# EAGLE board ev9200g_pac (EAGLE 3.55)

No outline drawn. Coordinates in mm, seen from the top.
Copper layers used: 

## Footprints (pad centres in the part's own frame; a part is rotated, then mirrored left to right if it is on the bottom)
G-44 = smd 0.5 x 2.35 rotated 4.3:  -4,-6.668;  3.2,-6.668 | smd 0.5 x 2.35 rotated 4.4:  -3.2,-6.668 | smd 0.5 x 2.35 rotated 4.5:  -2.4,-6.668;  -1.6,6.668 | smd 0.5 x 2.35 rotated 4.6:  -1.6,-6.668 | smd 0.5 x 2.35 rotated 4.7:  -0.8,-6.668;  0,-6.668 | smd 0.5 x 2.35 rotated 4.8:  0.8,-6.668 | smd 0.5 x 2.35 rotated 4.9:  1.6,-6.668 | smd 0.5 x 2.35 rotated 5:  2.4,-6.668 | smd 0.5 x 2.35 rotated 26.8:  4,-6.668 | smd 2.35 x 0.5 rotated 49.3:  6.668,-4 | smd 2.35 x 0.5 rotated 71.8:  6.668,-3.2 | smd 2.35 x 0.5 rotated 94.3:  6.668,-2.4 | smd 2.35 x 0.5 rotated 116.8:  6.668,-1.6 | smd 2.35 x 0.5 rotated 139.3:  6.668,-0.8 | smd 2.35 x 0.5 rotated 161.8:  6.668,0 | smd 2.35 x 0.5 rotated 184.3:  6.668,0.8 | smd 2.35 x 0.5 rotated 206.8:  6.668,1.6 | smd 2.35 x 0.5 rotated 4.4:  6.668,2.4 | smd 2.35 x 0.5 rotated 26.9:  6.668,3.2 | smd 2.35 x 0.5 rotated 49.4:  6.668,4 | smd 0.5 x 2.35 rotated 71.9:  4,6.668 | smd 0.5 x 2.35 rotated 94.4:  3.2,6.668 | smd 0.5 x 2.35 rotated 116.9:  2.4,6.668 | smd 0.5 x 2.35 rotated 139.4:  1.6,6.668 | smd 0.5 x 2.35 rotated 161.9:  0.8,6.668 | smd 0.5 x 2.35 rotated 184.4:  0,6.668 | smd 0.5 x 2.35 rotated 206.9:  -0.8,6.668 | smd 0.5 x 2.35 rotated 27:  -2.4,6.668 | smd 0.5 x 2.35 rotated 49.5:  -3.2,6.668 | smd 0.5 x 2.35 rotated 72:  -4,6.668 | smd 2.35 x 0.5 rotated 94.5:  -6.668,4 | smd 2.35 x 0.5 rotated 117:  -6.668,3.2 | smd 2.35 x 0.5 rotated 139.5:  -6.668,2.4 | smd 2.35 x 0.5 rotated 162:  -6.668,1.6 | smd 2.35 x 0.5 rotated 184.5:  -6.668,0.8 | smd 2.35 x 0.5 rotated 207:  -6.668,0 | smd 2.35 x 0.5 rotated 4.6:  -6.668,-0.8 | smd 2.35 x 0.5 rotated 27.1:  -6.668,-1.6 | smd 2.35 x 0.5 rotated 49.6:  -6.668,-2.4 | smd 2.35 x 0.5 rotated 72.1:  -6.668,-3.2 | smd 2.35 x 0.5 rotated 94.6:  -6.668,-4 | hole 2.2: 0,0 | hole 1.57: 2.489,-2.489; -2.489,2.489
G-64 = smd 0.6 x 2.35 rotated 4.6:  -6,-8.775;  2,8.775 | smd 0.6 x 2.35 rotated 4.7:  -5,-8.775;  -4,-8.775;  -8,8.775 | smd 0.6 x 2.35 rotated 4.8:  -3,-8.775 | smd 0.6 x 2.35 rotated 4.9:  -2,-8.775 | smd 0.6 x 2.35 rotated 5:  -1,-8.775 | smd 0.6 x 2.35 rotated 4.3:  0,-8.775;  -9,-8.775 | smd 0.6 x 2.35 rotated 26.8:  1,-8.775 | smd 0.6 x 2.35 rotated 49.3:  2,-8.775 | smd 0.6 x 2.35 rotated 71.8:  3,-8.775 | smd 0.6 x 2.35 rotated 94.3:  4,-8.775 | smd 0.6 x 2.35 rotated 116.8:  5,-8.775 | smd 0.6 x 2.35 rotated 139.3:  6,-8.775 | smd 0.6 x 2.35 rotated 161.8:  7,-8.775 | smd 0.6 x 2.35 rotated 4.5:  -7,-8.775 | smd 0.6 x 2.35 rotated 4.4:  -8,-8.775 | smd 0.6 x 2.35 rotated 184.3:  8,-8.775 | smd 0.6 x 2.35 rotated 206.8:  9,-8.775 | smd 2.35 x 0.6 rotated 71.9:  11.675,-3 | smd 2.35 x 0.6 rotated 94.4:  11.675,-2 | smd 2.35 x 0.6 rotated 116.9:  11.675,-1 | smd 2.35 x 0.6 rotated 139.4:  11.675,0 | smd 2.35 x 0.6 rotated 161.9:  11.675,1 | smd 2.35 x 0.6 rotated 184.4:  11.675,2 | smd 2.35 x 0.6 rotated 206.9:  11.675,3 | smd 2.35 x 0.6 rotated 4.5:  11.675,4 | smd 2.35 x 0.6 rotated 27:  11.675,5 | smd 2.35 x 0.6 rotated 49.5:  11.675,6 | smd 2.35 x 0.6 rotated 49.4:  11.675,-4 | smd 2.35 x 0.6 rotated 26.9:  11.675,-5 | smd 2.35 x 0.6 rotated 4.4:  11.675,-6 | smd 0.6 x 2.35 rotated 139.5:  6,8.775 | smd 0.6 x 2.35 rotated 162:  5,8.775 | smd 0.6 x 2.35 rotated 184.5:  4,8.775 | smd 0.6 x 2.35 rotated 207:  3,8.775 | smd 0.6 x 2.35 rotated 27.1:  1,8.775 | smd 0.6 x 2.35 rotated 49.6:  0,8.775 | smd 0.6 x 2.35 rotated 72.1:  -1,8.775 | smd 0.6 x 2.35 rotated 94.6:  -2,8.775 | smd 0.6 x 2.35 rotated 117.1:  -3,8.775 | smd 0.6 x 2.35 rotated 139.6:  -4,8.775 | smd 0.6 x 2.35 rotated 162.1:  -5,8.775 | smd 0.6 x 2.35 rotated 184.6:  -6,8.775 | smd 0.6 x 2.35 rotated 207.1:  -7,8.775 | smd 0.6 x 2.35 rotated 117:  7,8.775 | smd 0.6 x 2.35 rotated 94.5:  8,8.775 | smd 0.6 x 2.35 rotated 27.2:  -9,8.775 | smd 0.6 x 2.35 rotated 72:  9,8.775 | smd 2.35 x 0.6 rotated 117.2:  -11.675,3 | smd 2.35 x 0.6 rotated 139.7:  -11.675,2 | smd 2.35 x 0.6 rotated 162.2:  -11.675,1 | smd 2.35 x 0.6 rotated 184.7:  -11.675,0 | smd 2.35 x 0.6 rotated 207.2:  -11.675,-1 | smd 2.35 x 0.6 rotated 4.7:  -11.675,-2 | smd 2.35 x 0.6 rotated 27.2:  -11.675,-3 | smd 2.35 x 0.6 rotated 49.7:  -11.675,-4;  -11.675,6 | smd 2.35 x 0.6 rotated 72.2:  -11.675,-5;  -11.675,5 | smd 2.35 x 0.6 rotated 94.7:  -11.675,-6;  -11.675,4 | hole 1.57: 6,-2.5 | hole 2.36: -5.5,2.5
G-74 = smd 0.6 x 2.35 rotated 4.3:  -8,-11.675;  1,-11.675 | smd 0.6 x 2.35 rotated 4.4:  -7,-11.675 | smd 0.6 x 2.35 rotated 4.5:  -6,-11.675 | smd 0.6 x 2.35 rotated 4.6:  -5,-11.675;  7,11.675 | smd 0.6 x 2.35 rotated 4.7:  -4,-11.675;  -3,-11.675;  -3,11.675 | smd 0.6 x 2.35 rotated 4.8:  -2,-11.675 | smd 0.6 x 2.35 rotated 4.9:  -1,-11.675 | smd 0.6 x 2.35 rotated 5:  0,-11.675 | smd 0.6 x 2.35 rotated 26.8:  2,-11.675 | smd 0.6 x 2.35 rotated 49.3:  3,-11.675 | smd 0.6 x 2.35 rotated 71.8:  4,-11.675 | smd 0.6 x 2.35 rotated 94.3:  5,-11.675 | smd 0.6 x 2.35 rotated 116.8:  6,-11.675 | smd 0.6 x 2.35 rotated 139.3:  7,-11.675 | smd 0.6 x 2.35 rotated 161.8:  8,-11.675 | smd 0.6 x 2.35 rotated 184.3:  9,-11.675 | smd 2.35 x 0.6 rotated 206.8:  11.675,-9 | smd 2.35 x 0.6 rotated 4.4:  11.675,-8 | smd 2.35 x 0.6 rotated 26.9:  11.675,-7 | smd 2.35 x 0.6 rotated 49.4:  11.675,-6 | smd 2.35 x 0.6 rotated 71.9:  11.675,-5 | smd 2.35 x 0.6 rotated 94.4:  11.675,-4 | smd 2.35 x 0.6 rotated 116.9:  11.675,-3 | smd 2.35 x 0.6 rotated 139.4:  11.675,-2 | smd 2.35 x 0.6 rotated 161.9:  11.675,-1 | smd 2.35 x 0.6 rotated 184.4:  11.675,0 | smd 2.35 x 0.6 rotated 206.9:  11.675,1 | smd 2.35 x 0.6 rotated 4.5:  11.675,2 | smd 2.35 x 0.6 rotated 27:  11.675,3 | smd 2.35 x 0.6 rotated 49.5:  11.675,4 | smd 2.35 x 0.6 rotated 72:  11.675,5 | smd 2.35 x 0.6 rotated 94.5:  11.675,6 | smd 2.35 x 0.6 rotated 117:  11.675,7 | smd 2.35 x 0.6 rotated 139.5:  11.675,8 | smd 2.35 x 0.6 rotated 162:  11.675,9 | smd 0.6 x 2.35 rotated 184.5:  9,11.675 | smd 0.6 x 2.35 rotated 207:  8,11.675 | smd 0.6 x 2.35 rotated 27.1:  6,11.675 | smd 0.6 x 2.35 rotated 49.6:  5,11.675 | smd 0.6 x 2.35 rotated 72.1:  4,11.675 | smd 0.6 x 2.35 rotated 94.6:  3,11.675 | smd 0.6 x 2.35 rotated 117.1:  2,11.675 | smd 0.6 x 2.35 rotated 139.6:  1,11.675 | smd 0.6 x 2.35 rotated 162.1:  0,11.675 | smd 0.6 x 2.35 rotated 184.6:  -1,11.675 | smd 0.6 x 2.35 rotated 207.1:  -2,11.675 | smd 0.6 x 2.35 rotated 27.2:  -4,11.675 | smd 0.6 x 2.35 rotated 49.7:  -5,11.675 | smd 0.6 x 2.35 rotated 72.2:  -6,11.675 | smd 0.6 x 2.35 rotated 94.7:  -7,11.675 | smd 0.6 x 2.35 rotated 117.2:  -8,11.675 | smd 0.6 x 2.35 rotated 139.7:  -9,11.675 | smd 2.35 x 0.6 rotated 162.2:  -11.675,9;  -11.675,-1 | smd 2.35 x 0.6 rotated 184.7:  -11.675,8;  -11.675,-2 | smd 2.35 x 0.6 rotated 207.2:  -11.675,7;  -11.675,-3 | smd 2.35 x 0.6 rotated 4.7:  -11.675,6 | smd 2.35 x 0.6 rotated 27.2:  -11.675,5 | smd 2.35 x 0.6 rotated 49.7:  -11.675,4 | smd 2.35 x 0.6 rotated 72.2:  -11.675,3 | smd 2.35 x 0.6 rotated 94.7:  -11.675,2 | smd 2.35 x 0.6 rotated 117.2:  -11.675,1 | smd 2.35 x 0.6 rotated 139.7:  -11.675,0 | smd 2.35 x 0.6 rotated 4.8:  -11.675,-4 | smd 2.35 x 0.6 rotated 27.3:  -11.675,-5 | smd 2.35 x 0.6 rotated 49.8:  -11.675,-6 | smd 2.35 x 0.6 rotated 72.3:  -11.675,-7 | smd 2.35 x 0.6 rotated 94.8:  -11.675,-8 | hole 2.36: -5.5,2.5 | hole 1.57: 5.5,-2.5
G-80 = smd 0.5 x 2.35 rotated 4.3:  -9.2,-8.775;  -2,-8.775 | smd 0.5 x 2.35 rotated 4.4:  -8.4,-8.775;  6,-8.775 | smd 0.5 x 2.35 rotated 4.5:  -7.6,-8.775 | smd 0.5 x 2.35 rotated 4.6:  -6.8,-8.775 | smd 0.5 x 2.35 rotated 4.7:  -6,-8.775;  -5.2,-8.775;  2,8.775;  -6,8.775 | smd 0.5 x 2.35 rotated 4.8:  -4.4,-8.775 | smd 0.5 x 2.35 rotated 4.9:  -3.6,-8.775 | smd 0.5 x 2.35 rotated 5:  -2.8,-8.775 | smd 0.5 x 2.35 rotated 26.8:  -1.2,-8.775 | smd 0.5 x 2.35 rotated 49.3:  -0.4,-8.775 | smd 0.5 x 2.35 rotated 71.8:  0.4,-8.775 | smd 0.5 x 2.35 rotated 94.3:  1.2,-8.775 | smd 0.5 x 2.35 rotated 116.8:  2,-8.775 | smd 0.5 x 2.35 rotated 139.3:  2.8,-8.775 | smd 0.5 x 2.35 rotated 161.8:  3.6,-8.775 | smd 0.5 x 2.35 rotated 184.3:  4.4,-8.775 | smd 0.5 x 2.35 rotated 206.8:  5.2,-8.775 | smd 0.5 x 2.35 rotated 26.9:  6.8,-8.775 | smd 0.5 x 2.35 rotated 49.4:  7.6,-8.775 | smd 0.5 x 2.35 rotated 71.9:  8.4,-8.775 | smd 0.5 x 2.35 rotated 94.4:  9.2,-8.775 | smd 2.35 x 0.5 rotated 116.9:  11.675,-6 | smd 2.35 x 0.5 rotated 139.4:  11.675,-5.2 | smd 2.35 x 0.5 rotated 161.9:  11.675,-4.4 | smd 2.35 x 0.5 rotated 184.4:  11.675,-3.6 | smd 2.35 x 0.5 rotated 206.9:  11.675,-2.8 | smd 2.35 x 0.5 rotated 4.5:  11.675,-2 | smd 2.35 x 0.5 rotated 27:  11.675,-1.2 | smd 2.35 x 0.5 rotated 49.5:  11.675,-0.4 | smd 2.35 x 0.5 rotated 72:  11.675,0.4 | smd 2.35 x 0.5 rotated 94.5:  11.675,1.2 | smd 2.35 x 0.5 rotated 117:  11.675,2 | smd 2.35 x 0.5 rotated 139.5:  11.675,2.8 | smd 2.35 x 0.5 rotated 162:  11.675,3.6 | smd 2.35 x 0.5 rotated 184.5:  11.675,4.4 | smd 2.35 x 0.5 rotated 207:  11.675,5.2 | smd 2.35 x 0.5 rotated 4.6:  11.675,6 | smd 0.5 x 2.35 rotated 27.1:  9.2,8.775 | smd 0.5 x 2.35 rotated 49.6:  8.4,8.775 | smd 0.5 x 2.35 rotated 72.1:  7.6,8.775 | smd 0.5 x 2.35 rotated 94.6:  6.8,8.775 | smd 0.5 x 2.35 rotated 117.1:  6,8.775 | smd 0.5 x 2.35 rotated 139.6:  5.2,8.775 | smd 0.5 x 2.35 rotated 162.1:  4.4,8.775 | smd 0.5 x 2.35 rotated 184.6:  3.6,8.775 | smd 0.5 x 2.35 rotated 207.1:  2.8,8.775 | smd 0.5 x 2.35 rotated 27.2:  1.2,8.775;  -6.8,8.775 | smd 0.5 x 2.35 rotated 49.7:  0.4,8.775;  -7.6,8.775 | smd 0.5 x 2.35 rotated 72.2:  -0.4,8.775;  -8.4,8.775 | smd 0.5 x 2.35 rotated 94.7:  -1.2,8.775;  -9.2,8.775 | smd 0.5 x 2.35 rotated 117.2:  -2,8.775 | smd 0.5 x 2.35 rotated 139.7:  -2.8,8.775 | smd 0.5 x 2.35 rotated 162.2:  -3.6,8.775 | smd 0.5 x 2.35 rotated 184.7:  -4.4,8.775 | smd 0.5 x 2.35 rotated 207.2:  -5.2,8.775 | smd 2.35 x 0.5 rotated 117.2:  -11.675,6 | smd 2.35 x 0.5 rotated 139.7:  -11.675,5.2 | smd 2.35 x 0.5 rotated 162.2:  -11.675,4.4 | smd 2.35 x 0.5 rotated 184.7:  -11.675,3.6 | smd 2.35 x 0.5 rotated 207.2:  -11.675,2.8 | smd 2.35 x 0.5 rotated 4.8:  -11.675,2 | smd 2.35 x 0.5 rotated 27.3:  -11.675,1.2 | smd 2.35 x 0.5 rotated 49.8:  -11.675,0.4 | smd 2.35 x 0.5 rotated 72.3:  -11.675,-0.4 | smd 2.35 x 0.5 rotated 94.8:  -11.675,-1.2 | smd 2.35 x 0.5 rotated 117.3:  -11.675,-2 | smd 2.35 x 0.5 rotated 139.8:  -11.675,-2.8 | smd 2.35 x 0.5 rotated 162.3:  -11.675,-3.6 | smd 2.35 x 0.5 rotated 184.8:  -11.675,-4.4 | smd 2.35 x 0.5 rotated 207.3:  -11.675,-5.2 | smd 2.35 x 0.5 rotated 4.9:  -11.675,-6 | hole 1.57: 6,-2.5 | hole 2.36: -5.5,2.5
G-94 = smd 0.5 x 2.35 rotated 4.3:  -8.4,-11.675;  -1.2,-11.675 | smd 0.5 x 2.35 rotated 4.4:  -7.6,-11.675;  6.8,-11.675 | smd 0.5 x 2.35 rotated 4.5:  -6.8,-11.675 | smd 0.5 x 2.35 rotated 4.6:  -6,-11.675 | smd 0.5 x 2.35 rotated 4.7:  -5.2,-11.675;  -4.4,-11.675;  7.6,11.675;  -0.4,11.675 | smd 0.5 x 2.35 rotated 4.8:  -3.6,-11.675;  -8.4,11.675 | smd 0.5 x 2.35 rotated 4.9:  -2.8,-11.675 | smd 0.5 x 2.35 rotated 5:  -2,-11.675 | smd 0.5 x 2.35 rotated 26.8:  -0.4,-11.675 | smd 0.5 x 2.35 rotated 49.3:  0.4,-11.675 | smd 0.5 x 2.35 rotated 71.8:  1.2,-11.675 | smd 0.5 x 2.35 rotated 94.3:  2,-11.675 | smd 0.5 x 2.35 rotated 116.8:  2.8,-11.675 | smd 0.5 x 2.35 rotated 139.3:  3.6,-11.675 | smd 0.5 x 2.35 rotated 161.8:  4.4,-11.675 | smd 0.5 x 2.35 rotated 184.3:  5.2,-11.675 | smd 0.5 x 2.35 rotated 206.8:  6,-11.675 | smd 0.5 x 2.35 rotated 26.9:  7.6,-11.675 | smd 0.5 x 2.35 rotated 49.4:  8.4,-11.675 | smd 0.5 x 2.35 rotated 71.9:  9.2,-11.675 | smd 2.35 x 0.5 rotated 94.4:  11.675,-9.2 | smd 2.35 x 0.5 rotated 116.9:  11.675,-8.4 | smd 2.35 x 0.5 rotated 139.4:  11.675,-7.6 | smd 2.35 x 0.5 rotated 161.9:  11.675,-6.8 | smd 2.35 x 0.5 rotated 184.4:  11.675,-6 | smd 2.35 x 0.5 rotated 206.9:  11.675,-5.2 | smd 2.35 x 0.5 rotated 4.5:  11.675,-4.4 | smd 2.35 x 0.5 rotated 27:  11.675,-3.6 | smd 2.35 x 0.5 rotated 49.5:  11.675,-2.8 | smd 2.35 x 0.5 rotated 72:  11.675,-2 | smd 2.35 x 0.5 rotated 94.5:  11.675,-1.2 | smd 2.35 x 0.5 rotated 117:  11.675,-0.4 | smd 2.35 x 0.5 rotated 139.5:  11.675,0.4 | smd 2.35 x 0.5 rotated 162:  11.675,1.2 | smd 2.35 x 0.5 rotated 184.5:  11.675,2 | smd 2.35 x 0.5 rotated 207:  11.675,2.8 | smd 2.35 x 0.5 rotated 4.6:  11.675,3.6 | smd 2.35 x 0.5 rotated 27.1:  11.675,4.4 | smd 2.35 x 0.5 rotated 49.6:  11.675,5.2 | smd 2.35 x 0.5 rotated 72.1:  11.675,6 | smd 2.35 x 0.5 rotated 94.6:  11.675,6.8 | smd 2.35 x 0.5 rotated 117.1:  11.675,7.6 | smd 2.35 x 0.5 rotated 139.6:  11.675,8.4 | smd 2.35 x 0.5 rotated 162.1:  11.675,9.2 | smd 0.5 x 2.35 rotated 184.6:  9.2,11.675 | smd 0.5 x 2.35 rotated 207.1:  8.4,11.675 | smd 0.5 x 2.35 rotated 27.2:  6.8,11.675;  -1.2,11.675 | smd 0.5 x 2.35 rotated 49.7:  6,11.675;  -2,11.675 | smd 0.5 x 2.35 rotated 72.2:  5.2,11.675;  -2.8,11.675 | smd 0.5 x 2.35 rotated 94.7:  4.4,11.675;  -3.6,11.675 | smd 0.5 x 2.35 rotated 117.2:  3.6,11.675;  -4.4,11.675 | smd 0.5 x 2.35 rotated 139.7:  2.8,11.675;  -5.2,11.675 | smd 0.5 x 2.35 rotated 162.2:  2,11.675;  -6,11.675 | smd 0.5 x 2.35 rotated 184.7:  1.2,11.675;  -6.8,11.675 | smd 0.5 x 2.35 rotated 207.2:  0.4,11.675;  -7.6,11.675 | smd 0.5 x 2.35 rotated 27.3:  -9.2,11.675 | smd 2.35 x 0.5 rotated 49.8:  -11.675,9.2 | smd 2.35 x 0.5 rotated 72.3:  -11.675,8.4 | smd 2.35 x 0.5 rotated 94.8:  -11.675,7.6 | smd 2.35 x 0.5 rotated 117.3:  -11.675,6.8 | smd 2.35 x 0.5 rotated 139.8:  -11.675,6 | smd 2.35 x 0.5 rotated 162.3:  -11.675,5.2 | smd 2.35 x 0.5 rotated 184.8:  -11.675,4.4 | smd 2.35 x 0.5 rotated 207.3:  -11.675,3.6 | smd 2.35 x 0.5 rotated 4.9:  -11.675,2.8 | smd 2.35 x 0.5 rotated 27.4:  -11.675,2 | smd 2.35 x 0.5 rotated 49.9:  -11.675,1.2 | smd 2.35 x 0.5 rotated 72.4:  -11.675,0.4 | smd 2.35 x 0.5 rotated 94.9:  -11.675,-0.4 | smd 2.35 x 0.5 rotated 117.4:  -11.675,-1.2 | smd 2.35 x 0.5 rotated 139.9:  -11.675,-2 | smd 2.35 x 0.5 rotated 162.4:  -11.675,-2.8 | smd 2.35 x 0.5 rotated 184.9:  -11.675,-3.6 | smd 2.35 x 0.5 rotated 207.4:  -11.675,-4.4 | smd 2.35 x 0.5 rotated 5:  -11.675,-5.2 | smd 2.35 x 0.5 rotated 27.5:  -11.675,-6 | smd 2.35 x 0.5 rotated 50:  -11.675,-6.8 | smd 2.35 x 0.5 rotated 72.5:  -11.675,-7.6 | smd 2.35 x 0.5 rotated 95:  -11.675,-8.4 | hole 2.36: -5.5,2.5 | hole 1.57: 5.5,-2.5
GC-52 = smd 0.6 x 2.35 rotated 4.3:  -6,-8.775;  3,-8.775 | smd 0.6 x 2.35 rotated 4.4:  -5,-8.775 | smd 0.6 x 2.35 rotated 4.5:  -4,-8.775;  3,8.775 | smd 0.6 x 2.35 rotated 4.6:  -3,-8.775 | smd 0.6 x 2.35 rotated 4.7:  -2,-8.775;  -1,-8.775 | smd 0.6 x 2.35 rotated 4.8:  0,-8.775 | smd 0.6 x 2.35 rotated 4.9:  1,-8.775 | smd 0.6 x 2.35 rotated 5:  2,-8.775 | smd 0.6 x 2.35 rotated 26.8:  4,-8.775 | smd 0.6 x 2.35 rotated 49.3:  5,-8.775 | smd 0.6 x 2.35 rotated 71.8:  6,-8.775 | smd 2.35 x 0.6 rotated 94.3:  8.775,-6 | smd 2.35 x 0.6 rotated 116.8:  8.775,-5 | smd 2.35 x 0.6 rotated 139.3:  8.775,-4 | smd 2.35 x 0.6 rotated 161.8:  8.775,-3 | smd 2.35 x 0.6 rotated 184.3:  8.775,-2 | smd 2.35 x 0.6 rotated 206.8:  8.775,-1 | smd 2.35 x 0.6 rotated 4.4:  8.775,0 | smd 2.35 x 0.6 rotated 26.9:  8.775,1 | smd 2.35 x 0.6 rotated 49.4:  8.775,2 | smd 2.35 x 0.6 rotated 71.9:  8.775,3 | smd 2.35 x 0.6 rotated 94.4:  8.775,4 | smd 2.35 x 0.6 rotated 116.9:  8.775,5 | smd 2.35 x 0.6 rotated 139.4:  8.775,6 | smd 0.6 x 2.35 rotated 161.9:  6,8.775 | smd 0.6 x 2.35 rotated 184.4:  5,8.775 | smd 0.6 x 2.35 rotated 206.9:  4,8.775 | smd 0.6 x 2.35 rotated 27:  2,8.775 | smd 0.6 x 2.35 rotated 49.5:  1,8.775 | smd 0.6 x 2.35 rotated 72:  0,8.775 | smd 0.6 x 2.35 rotated 94.5:  -1,8.775 | smd 0.6 x 2.35 rotated 117:  -2,8.775 | smd 0.6 x 2.35 rotated 139.5:  -3,8.775 | smd 0.6 x 2.35 rotated 162:  -4,8.775 | smd 0.6 x 2.35 rotated 184.5:  -5,8.775 | smd 0.6 x 2.35 rotated 207:  -6,8.775 | smd 2.35 x 0.6 rotated 4.6:  -8.775,6 | smd 2.35 x 0.6 rotated 27.1:  -8.775,5 | smd 2.35 x 0.6 rotated 49.6:  -8.775,4 | smd 2.35 x 0.6 rotated 72.1:  -8.775,3 | smd 2.35 x 0.6 rotated 94.6:  -8.775,2 | smd 2.35 x 0.6 rotated 117.1:  -8.775,1 | smd 2.35 x 0.6 rotated 139.6:  -8.775,0 | smd 2.35 x 0.6 rotated 162.1:  -8.775,-1 | smd 2.35 x 0.6 rotated 184.6:  -8.775,-2 | smd 2.35 x 0.6 rotated 207.1:  -8.775,-3 | smd 2.35 x 0.6 rotated 4.7:  -8.775,-4 | smd 2.35 x 0.6 rotated 27.2:  -8.775,-5 | smd 2.35 x 0.6 rotated 49.7:  -8.775,-6 | hole 2.2: 0,0 | hole 1.57: 2.489,-2.489 | hole 2.36: -2.489,2.489
GC-64 = smd 0.5 x 2.35 rotated 4.3:  -6,-8.575;  1.2,-8.575 | smd 0.5 x 2.35 rotated 4.4:  -5.2,-8.575 | smd 0.5 x 2.35 rotated 4.5:  -4.4,-8.575 | smd 0.5 x 2.35 rotated 4.6:  -3.6,-8.575;  0.4,8.575 | smd 0.5 x 2.35 rotated 4.7:  -2.8,-8.575;  -2,-8.575 | smd 0.5 x 2.35 rotated 4.8:  -1.2,-8.575 | smd 0.5 x 2.35 rotated 4.9:  -0.4,-8.575 | smd 0.5 x 2.35 rotated 5:  0.4,-8.575 | smd 0.5 x 2.35 rotated 26.8:  2,-8.575 | smd 0.5 x 2.35 rotated 49.3:  2.8,-8.575 | smd 0.5 x 2.35 rotated 71.8:  3.6,-8.575 | smd 0.5 x 2.35 rotated 94.3:  4.4,-8.575 | smd 0.5 x 2.35 rotated 116.8:  5.2,-8.575 | smd 0.5 x 2.35 rotated 139.3:  6,-8.575 | smd 2.35 x 0.5 rotated 161.8:  8.575,-6 | smd 2.35 x 0.5 rotated 184.3:  8.575,-5.2 | smd 2.35 x 0.5 rotated 206.8:  8.575,-4.4 | smd 2.35 x 0.5 rotated 4.4:  8.575,-3.6 | smd 2.35 x 0.5 rotated 26.9:  8.575,-2.8 | smd 2.35 x 0.5 rotated 49.4:  8.575,-2 | smd 2.35 x 0.5 rotated 71.9:  8.575,-1.2 | smd 2.35 x 0.5 rotated 94.4:  8.575,-0.4 | smd 2.35 x 0.5 rotated 116.9:  8.575,0.4 | smd 2.35 x 0.5 rotated 139.4:  8.575,1.2 | smd 2.35 x 0.5 rotated 161.9:  8.575,2 | smd 2.35 x 0.5 rotated 184.4:  8.575,2.8 | smd 2.35 x 0.5 rotated 206.9:  8.575,3.6 | smd 2.35 x 0.5 rotated 4.5:  8.575,4.4 | smd 2.35 x 0.5 rotated 27:  8.575,5.2 | smd 2.35 x 0.5 rotated 49.5:  8.575,6 | smd 0.5 x 2.35 rotated 72:  6,8.575 | smd 0.5 x 2.35 rotated 94.5:  5.2,8.575 | smd 0.5 x 2.35 rotated 117:  4.4,8.575 | smd 0.5 x 2.35 rotated 139.5:  3.6,8.575 | smd 0.5 x 2.35 rotated 162:  2.8,8.575 | smd 0.5 x 2.35 rotated 184.5:  2,8.575 | smd 0.5 x 2.35 rotated 207:  1.2,8.575 | smd 0.5 x 2.35 rotated 27.1:  -0.4,8.575 | smd 0.5 x 2.35 rotated 49.6:  -1.2,8.575 | smd 0.5 x 2.35 rotated 72.1:  -2,8.575 | smd 0.5 x 2.35 rotated 94.6:  -2.8,8.575 | smd 0.5 x 2.35 rotated 117.1:  -3.6,8.575 | smd 0.5 x 2.35 rotated 139.6:  -4.4,8.575 | smd 0.5 x 2.35 rotated 162.1:  -5.2,8.575 | smd 0.5 x 2.35 rotated 184.6:  -6,8.575 | smd 2.35 x 0.5 rotated 207.1:  -8.575,6 | smd 2.35 x 0.5 rotated 4.7:  -8.575,5.2;  -8.575,-2.8 | smd 2.35 x 0.5 rotated 27.2:  -8.575,4.4;  -8.575,-3.6 | smd 2.35 x 0.5 rotated 49.7:  -8.575,3.6;  -8.575,-4.4 | smd 2.35 x 0.5 rotated 72.2:  -8.575,2.8;  -8.575,-5.2 | smd 2.35 x 0.5 rotated 94.7:  -8.575,2;  -8.575,-6 | smd 2.35 x 0.5 rotated 117.2:  -8.575,1.2 | smd 2.35 x 0.5 rotated 139.7:  -8.575,0.4 | smd 2.35 x 0.5 rotated 162.2:  -8.575,-0.4 | smd 2.35 x 0.5 rotated 184.7:  -8.575,-1.2 | smd 2.35 x 0.5 rotated 207.2:  -8.575,-2 | hole 1.57: 3,-3 | hole 2.2: 0,0 | hole 2.36: -3,3
GC-80 = smd 0.35 x 2.35 rotated 4.3:  -6.175,-8.675;  -0.325,-8.675 | smd 0.35 x 2.35 rotated 4.4:  -5.525,-8.675;  6.175,-8.675 | smd 0.35 x 2.35 rotated 4.5:  -4.875,-8.675 | smd 0.35 x 2.35 rotated 4.6:  -4.225,-8.675 | smd 0.35 x 2.35 rotated 4.7:  -3.575,-8.675;  -2.925,-8.675;  0.325,8.675;  -6.175,8.675 | smd 0.35 x 2.35 rotated 4.8:  -2.275,-8.675 | smd 0.35 x 2.35 rotated 4.9:  -1.625,-8.675 | smd 0.35 x 2.35 rotated 5:  -0.975,-8.675 | smd 0.35 x 2.35 rotated 26.8:  0.325,-8.675 | smd 0.35 x 2.35 rotated 49.3:  0.975,-8.675 | smd 0.35 x 2.35 rotated 71.8:  1.625,-8.675 | smd 0.35 x 2.35 rotated 94.3:  2.275,-8.675 | smd 0.35 x 2.35 rotated 116.8:  2.925,-8.675 | smd 0.35 x 2.35 rotated 139.3:  3.575,-8.675 | smd 0.35 x 2.35 rotated 161.8:  4.225,-8.675 | smd 0.35 x 2.35 rotated 184.3:  4.875,-8.675 | smd 0.35 x 2.35 rotated 206.8:  5.525,-8.675 | smd 2.35 x 0.35 rotated 26.9:  8.675,-6.175 | smd 2.35 x 0.35 rotated 49.4:  8.675,-5.525 | smd 2.35 x 0.35 rotated 71.9:  8.675,-4.875 | smd 2.35 x 0.35 rotated 94.4:  8.675,-4.225 | smd 2.35 x 0.35 rotated 116.9:  8.675,-3.575 | smd 2.35 x 0.35 rotated 139.4:  8.675,-2.925 | smd 2.35 x 0.35 rotated 161.9:  8.675,-2.275 | smd 2.35 x 0.35 rotated 184.4:  8.675,-1.625 | smd 2.35 x 0.35 rotated 206.9:  8.675,-0.975 | smd 2.35 x 0.35 rotated 4.5:  8.675,-0.325 | smd 2.35 x 0.35 rotated 27:  8.675,0.325 | smd 2.35 x 0.35 rotated 49.5:  8.675,0.975 | smd 2.35 x 0.35 rotated 72:  8.675,1.625 | smd 2.35 x 0.35 rotated 94.5:  8.675,2.275 | smd 2.35 x 0.35 rotated 117:  8.675,2.925 | smd 2.35 x 0.35 rotated 139.5:  8.675,3.575 | smd 2.35 x 0.35 rotated 162:  8.675,4.225 | smd 2.35 x 0.35 rotated 184.5:  8.675,4.875 | smd 2.35 x 0.35 rotated 207:  8.675,5.525 | smd 2.35 x 0.35 rotated 4.6:  8.675,6.175 | smd 0.35 x 2.35 rotated 27.1:  6.175,8.675 | smd 0.35 x 2.35 rotated 49.6:  5.525,8.675 | smd 0.35 x 2.35 rotated 72.1:  4.875,8.675 | smd 0.35 x 2.35 rotated 94.6:  4.225,8.675 | smd 0.35 x 2.35 rotated 117.1:  3.575,8.675 | smd 0.35 x 2.35 rotated 139.6:  2.925,8.675 | smd 0.35 x 2.35 rotated 162.1:  2.275,8.675 | smd 0.35 x 2.35 rotated 184.6:  1.625,8.675 | smd 0.35 x 2.35 rotated 207.1:  0.975,8.675 | smd 0.35 x 2.35 rotated 27.2:  -0.325,8.675 | smd 0.35 x 2.35 rotated 49.7:  -0.975,8.675 | smd 0.35 x 2.35 rotated 72.2:  -1.625,8.675 | smd 0.35 x 2.35 rotated 94.7:  -2.275,8.675 | smd 0.35 x 2.35 rotated 117.2:  -2.925,8.675 | smd 0.35 x 2.35 rotated 139.7:  -3.575,8.675 | smd 0.35 x 2.35 rotated 162.2:  -4.225,8.675 | smd 0.35 x 2.35 rotated 184.7:  -4.875,8.675 | smd 0.35 x 2.35 rotated 207.2:  -5.525,8.675 | smd 2.35 x 0.35 rotated 27.2:  -8.675,6.175 | smd 2.35 x 0.35 rotated 49.7:  -8.675,5.525 | smd 2.35 x 0.35 rotated 72.2:  -8.675,4.875 | smd 2.35 x 0.35 rotated 94.7:  -8.675,4.225 | smd 2.35 x 0.35 rotated 117.2:  -8.675,3.575 | smd 2.35 x 0.35 rotated 139.7:  -8.675,2.925 | smd 2.35 x 0.35 rotated 162.2:  -8.675,2.275 | smd 2.35 x 0.35 rotated 184.7:  -8.675,1.625 | smd 2.35 x 0.35 rotated 207.2:  -8.675,0.975 | smd 2.35 x 0.35 rotated 4.8:  -8.675,0.325 | smd 2.35 x 0.35 rotated 27.3:  -8.675,-0.325 | smd 2.35 x 0.35 rotated 49.8:  -8.675,-0.975 | smd 2.35 x 0.35 rotated 72.3:  -8.675,-1.625 | smd 2.35 x 0.35 rotated 94.8:  -8.675,-2.275 | smd 2.35 x 0.35 rotated 117.3:  -8.675,-2.925 | smd 2.35 x 0.35 rotated 139.8:  -8.675,-3.575 | smd 2.35 x 0.35 rotated 162.3:  -8.675,-4.225 | smd 2.35 x 0.35 rotated 184.8:  -8.675,-4.875 | smd 2.35 x 0.35 rotated 207.3:  -8.675,-5.525 | smd 2.35 x 0.35 rotated 4.9:  -8.675,-6.175 | hole 1.57: 3,-3 | hole 2.2: 0,0 | hole 2.36: -3,3
GD-120 = smd 0.5 x 2.35 rotated 4.3:  -11.6,-15.32;  -4.4,-15.32 | smd 0.5 x 2.35 rotated 4.4:  -10.8,-15.32;  3.6,-15.32 | smd 0.5 x 2.35 rotated 4.5:  -10,-15.32;  11.6,-15.32 | smd 0.5 x 2.35 rotated 4.6:  -9.2,-15.32 | smd 0.5 x 2.35 rotated 4.7:  -8.4,-15.32;  -7.6,-15.32 | smd 0.5 x 2.35 rotated 4.8:  -6.8,-15.32;  4.4,15.32 | smd 0.5 x 2.35 rotated 4.9:  -6,-15.32;  -3.6,15.32 | smd 0.5 x 2.35 rotated 5:  -5.2,-15.32;  -11.6,15.32 | smd 0.5 x 2.35 rotated 26.8:  -3.6,-15.32 | smd 0.5 x 2.35 rotated 49.3:  -2.8,-15.32 | smd 0.5 x 2.35 rotated 71.8:  -2,-15.32 | smd 0.5 x 2.35 rotated 94.3:  -1.2,-15.32 | smd 0.5 x 2.35 rotated 116.8:  -0.4,-15.32 | smd 0.5 x 2.35 rotated 139.3:  0.4,-15.32 | smd 0.5 x 2.35 rotated 161.8:  1.2,-15.32 | smd 0.5 x 2.35 rotated 184.3:  2,-15.32 | smd 0.5 x 2.35 rotated 206.8:  2.8,-15.32 | smd 0.5 x 2.35 rotated 26.9:  4.4,-15.32 | smd 0.5 x 2.35 rotated 49.4:  5.2,-15.32 | smd 0.5 x 2.35 rotated 71.9:  6,-15.32 | smd 0.5 x 2.35 rotated 94.4:  6.8,-15.32 | smd 0.5 x 2.35 rotated 116.9:  7.6,-15.32 | smd 0.5 x 2.35 rotated 139.4:  8.4,-15.32 | smd 0.5 x 2.35 rotated 161.9:  9.2,-15.32 | smd 0.5 x 2.35 rotated 184.4:  10,-15.32 | smd 0.5 x 2.35 rotated 206.9:  10.8,-15.32 | smd 2.35 x 0.5 rotated 27:  15.32,-11.6 | smd 2.35 x 0.5 rotated 49.5:  15.32,-10.8 | smd 2.35 x 0.5 rotated 72:  15.32,-10 | smd 2.35 x 0.5 rotated 94.5:  15.32,-9.2 | smd 2.35 x 0.5 rotated 117:  15.32,-8.4 | smd 2.35 x 0.5 rotated 139.5:  15.32,-7.6 | smd 2.35 x 0.5 rotated 162:  15.32,-6.8 | smd 2.35 x 0.5 rotated 184.5:  15.32,-6 | smd 2.35 x 0.5 rotated 207:  15.32,-5.2 | smd 2.35 x 0.5 rotated 4.6:  15.32,-4.4 | smd 2.35 x 0.5 rotated 27.1:  15.32,-3.6 | smd 2.35 x 0.5 rotated 49.6:  15.32,-2.8 | smd 2.35 x 0.5 rotated 72.1:  15.32,-2 | smd 2.35 x 0.5 rotated 94.6:  15.32,-1.2 | smd 2.35 x 0.5 rotated 117.1:  15.32,-0.4 | smd 2.35 x 0.5 rotated 139.6:  15.32,0.4 | smd 2.35 x 0.5 rotated 162.1:  15.32,1.2 | smd 2.35 x 0.5 rotated 184.6:  15.32,2 | smd 2.35 x 0.5 rotated 207.1:  15.32,2.8 | smd 2.35 x 0.5 rotated 4.7:  15.32,3.6;  15.32,11.6 | smd 2.35 x 0.5 rotated 27.2:  15.32,4.4 | smd 2.35 x 0.5 rotated 49.7:  15.32,5.2 | smd 2.35 x 0.5 rotated 72.2:  15.32,6 | smd 2.35 x 0.5 rotated 94.7:  15.32,6.8 | smd 2.35 x 0.5 rotated 117.2:  15.32,7.6 | smd 2.35 x 0.5 rotated 139.7:  15.32,8.4 | smd 2.35 x 0.5 rotated 162.2:  15.32,9.2 | smd 2.35 x 0.5 rotated 184.7:  15.32,10 | smd 2.35 x 0.5 rotated 207.2:  15.32,10.8 | smd 0.5 x 2.35 rotated 27.2:  11.6,15.32 | smd 0.5 x 2.35 rotated 49.7:  10.8,15.32 | smd 0.5 x 2.35 rotated 72.2:  10,15.32 | smd 0.5 x 2.35 rotated 94.7:  9.2,15.32 | smd 0.5 x 2.35 rotated 117.2:  8.4,15.32 | smd 0.5 x 2.35 rotated 139.7:  7.6,15.32 | smd 0.5 x 2.35 rotated 162.2:  6.8,15.32 | smd 0.5 x 2.35 rotated 184.7:  6,15.32 | smd 0.5 x 2.35 rotated 207.2:  5.2,15.32 | smd 0.5 x 2.35 rotated 27.3:  3.6,15.32 | smd 0.5 x 2.35 rotated 49.8:  2.8,15.32 | smd 0.5 x 2.35 rotated 72.3:  2,15.32 | smd 0.5 x 2.35 rotated 94.8:  1.2,15.32 | smd 0.5 x 2.35 rotated 117.3:  0.4,15.32 | smd 0.5 x 2.35 rotated 139.8:  -0.4,15.32 | smd 0.5 x 2.35 rotated 162.3:  -1.2,15.32 | smd 0.5 x 2.35 rotated 184.8:  -2,15.32 | smd 0.5 x 2.35 rotated 207.3:  -2.8,15.32 | smd 0.5 x 2.35 rotated 27.4:  -4.4,15.32 | smd 0.5 x 2.35 rotated 49.9:  -5.2,15.32 | smd 0.5 x 2.35 rotated 72.4:  -6,15.32 | smd 0.5 x 2.35 rotated 94.9:  -6.8,15.32 | smd 0.5 x 2.35 rotated 117.4:  -7.6,15.32 | smd 0.5 x 2.35 rotated 139.9:  -8.4,15.32 | smd 0.5 x 2.35 rotated 162.4:  -9.2,15.32 | smd 0.5 x 2.35 rotated 184.9:  -10,15.32 | smd 0.5 x 2.35 rotated 207.4:  -10.8,15.32 | smd 2.35 x 0.5 rotated 27.5:  -15.32,11.6 | smd 2.35 x 0.5 rotated 50:  -15.32,10.8 | smd 2.35 x 0.5 rotated 72.5:  -15.32,10 | smd 2.35 x 0.5 rotated 95:  -15.32,9.2 | smd 2.35 x 0.5 rotated 117.5:  -15.32,8.4 | smd 2.35 x 0.5 rotated 140:  -15.32,7.6 | smd 2.35 x 0.5 rotated 162.5:  -15.32,6.8 | smd 2.35 x 0.5 rotated 185:  -15.32,6 | smd 2.35 x 0.5 rotated 207.5:  -15.32,5.2 | smd 2.35 x 0.5 rotated 4.3:  -15.32,4.4;  -15.32,3.6;  -15.32,2.8;  -15.32,2;  -15.32,1.2;  -15.32,0.4;  -15.32,-0.4;  -15.32,-1.2;  -15.32,-2;  -15.32,-2.8 | smd 2.35 x 0.5 rotated 26.8:  -15.32,-3.6;  -15.32,-4.4;  -15.32,-5.2;  -15.32,-6;  -15.32,-6.8;  -15.32,-7.6;  -15.32,-8.4;  -15.32,-9.2;  -15.32,-10;  -15.32,-10.8 | smd 2.35 x 0.5 rotated 49.3:  -15.32,-11.6 | hole 2.36: -5.5,5.5 | hole 1.57: 5.5,-5.5
GF-100 = smd 0.35 x 2.35 rotated 4.3:  -9.425,-8.975;  -3.575,-8.975 | smd 0.35 x 2.35 rotated 4.4:  -8.775,-8.975;  2.925,-8.975 | smd 0.35 x 2.35 rotated 4.5:  -8.125,-8.975;  9.425,-8.975 | smd 0.35 x 2.35 rotated 4.6:  -7.475,-8.975 | smd 0.35 x 2.35 rotated 4.7:  -6.825,-8.975;  -6.175,-8.975;  3.575,8.975 | smd 0.35 x 2.35 rotated 4.8:  -5.525,-8.975;  -2.925,8.975 | smd 0.35 x 2.35 rotated 4.9:  -4.875,-8.975;  -9.425,8.975 | smd 0.35 x 2.35 rotated 5:  -4.225,-8.975 | smd 0.35 x 2.35 rotated 26.8:  -2.925,-8.975 | smd 0.35 x 2.35 rotated 49.3:  -2.275,-8.975 | smd 0.35 x 2.35 rotated 71.8:  -1.625,-8.975 | smd 0.35 x 2.35 rotated 94.3:  -0.975,-8.975 | smd 0.35 x 2.35 rotated 116.8:  -0.325,-8.975 | smd 0.35 x 2.35 rotated 139.3:  0.325,-8.975 | smd 0.35 x 2.35 rotated 161.8:  0.975,-8.975 | smd 0.35 x 2.35 rotated 184.3:  1.625,-8.975 | smd 0.35 x 2.35 rotated 206.8:  2.275,-8.975 | smd 0.35 x 2.35 rotated 26.9:  3.575,-8.975 | smd 0.35 x 2.35 rotated 49.4:  4.225,-8.975 | smd 0.35 x 2.35 rotated 71.9:  4.875,-8.975 | smd 0.35 x 2.35 rotated 94.4:  5.525,-8.975 | smd 0.35 x 2.35 rotated 116.9:  6.175,-8.975 | smd 0.35 x 2.35 rotated 139.4:  6.825,-8.975 | smd 0.35 x 2.35 rotated 161.9:  7.475,-8.975 | smd 0.35 x 2.35 rotated 184.4:  8.125,-8.975 | smd 0.35 x 2.35 rotated 206.9:  8.775,-8.975 | smd 2.35 x 0.35 rotated 27:  11.975,-6.175 | smd 2.35 x 0.35 rotated 49.5:  11.975,-5.525 | smd 2.35 x 0.35 rotated 72:  11.975,-4.875 | smd 2.35 x 0.35 rotated 94.5:  11.975,-4.225 | smd 2.35 x 0.35 rotated 117:  11.975,-3.575 | smd 2.35 x 0.35 rotated 139.5:  11.975,-2.925 | smd 2.35 x 0.35 rotated 162:  11.975,-2.275 | smd 2.35 x 0.35 rotated 184.5:  11.975,-1.625 | smd 2.35 x 0.35 rotated 207:  11.975,-0.975 | smd 2.35 x 0.35 rotated 4.6:  11.975,-0.325 | smd 2.35 x 0.35 rotated 27.1:  11.975,0.325 | smd 2.35 x 0.35 rotated 49.6:  11.975,0.975 | smd 2.35 x 0.35 rotated 72.1:  11.975,1.625 | smd 2.35 x 0.35 rotated 94.6:  11.975,2.275 | smd 2.35 x 0.35 rotated 117.1:  11.975,2.925 | smd 2.35 x 0.35 rotated 139.6:  11.975,3.575 | smd 2.35 x 0.35 rotated 162.1:  11.975,4.225 | smd 2.35 x 0.35 rotated 184.6:  11.975,4.875 | smd 2.35 x 0.35 rotated 207.1:  11.975,5.525 | smd 2.35 x 0.35 rotated 4.7:  11.975,6.175 | smd 0.35 x 2.35 rotated 27.2:  9.425,8.975;  2.925,8.975 | smd 0.35 x 2.35 rotated 49.7:  8.775,8.975;  2.275,8.975 | smd 0.35 x 2.35 rotated 72.2:  8.125,8.975;  1.625,8.975 | smd 0.35 x 2.35 rotated 94.7:  7.475,8.975;  0.975,8.975 | smd 0.35 x 2.35 rotated 117.2:  6.825,8.975;  0.325,8.975 | smd 0.35 x 2.35 rotated 139.7:  6.175,8.975;  -0.325,8.975 | smd 0.35 x 2.35 rotated 162.2:  5.525,8.975;  -0.975,8.975 | smd 0.35 x 2.35 rotated 184.7:  4.875,8.975;  -1.625,8.975 | smd 0.35 x 2.35 rotated 207.2:  4.225,8.975;  -2.275,8.975 | smd 0.35 x 2.35 rotated 27.3:  -3.575,8.975 | smd 0.35 x 2.35 rotated 49.8:  -4.225,8.975 | smd 0.35 x 2.35 rotated 72.3:  -4.875,8.975 | smd 0.35 x 2.35 rotated 94.8:  -5.525,8.975 | smd 0.35 x 2.35 rotated 117.3:  -6.175,8.975 | smd 0.35 x 2.35 rotated 139.8:  -6.825,8.975 | smd 0.35 x 2.35 rotated 162.3:  -7.475,8.975 | smd 0.35 x 2.35 rotated 184.8:  -8.125,8.975 | smd 0.35 x 2.35 rotated 207.3:  -8.775,8.975 | smd 2.35 x 0.35 rotated 27.4:  -11.975,6.175 | smd 2.35 x 0.35 rotated 49.9:  -11.975,5.525 | smd 2.35 x 0.35 rotated 72.4:  -11.975,4.875 | smd 2.35 x 0.35 rotated 94.9:  -11.975,4.225 | smd 2.35 x 0.35 rotated 117.4:  -11.975,3.575 | smd 2.35 x 0.35 rotated 139.9:  -11.975,2.925 | smd 2.35 x 0.35 rotated 162.4:  -11.975,2.275 | smd 2.35 x 0.35 rotated 184.9:  -11.975,1.625 | smd 2.35 x 0.35 rotated 207.4:  -11.975,0.975 | smd 2.35 x 0.35 rotated 5:  -11.975,0.325 | smd 2.35 x 0.35 rotated 27.5:  -11.975,-0.325 | smd 2.35 x 0.35 rotated 50:  -11.975,-0.975 | smd 2.35 x 0.35 rotated 72.5:  -11.975,-1.625 | smd 2.35 x 0.35 rotated 95:  -11.975,-2.275 | smd 2.35 x 0.35 rotated 117.5:  -11.975,-2.925 | smd 2.35 x 0.35 rotated 140:  -11.975,-3.575 | smd 2.35 x 0.35 rotated 162.5:  -11.975,-4.225 | smd 2.35 x 0.35 rotated 185:  -11.975,-4.875 | smd 2.35 x 0.35 rotated 207.5:  -11.975,-5.525 | smd 2.35 x 0.35 rotated 4.3:  -11.975,-6.175 | hole 2.36: -6,3 | hole 2.3: 0,0 | hole 1.57: 6,-3

## Placement (x,y rotation side)
E$2  ev9200g  [-35SC]  0,0 0 top
EVG-44  [G-44]  38.1,241.3 0 top
EVG-64  [G-64]  38.1,203.2 0 top
EVG-74  [G-74]  38.1,152.4 0 top
EVG-80  [G-80]  38.1,101.6 0 top
EVG-94  [G-94]  38.1,50.8 0 top
EVGC-52  [GC-52]  114.3,241.3 0 top
EVGC-64  [GC-64]  114.3,203.2 0 top
EVGC-80  [GC-80]  114.3,152.4 0 top
EVGD-120  [GD-120]  114.3,50.8 0 top
EVGF-100  [GF-100]  114.3,101.6 0 top

## Library data of the parts
E$2 = BLATT
EVG-44 EVG-64 EVG-74 EVG-80 EVG-94 EVGC-52 EVGC-64 EVGC-80 EVGD-120 EVGF-100 = ev9200g